# Altium PCB PCB1.PcbDoc
Units mil, origin at the board's own origin, x right, y up, seen from the top; angles counter-clockwise.
Board outline 6000 x 4000 mil, 2 copper layers (Top Layer, Bottom Layer); 4 components, 27 nets, 54 pads, 27 vias.
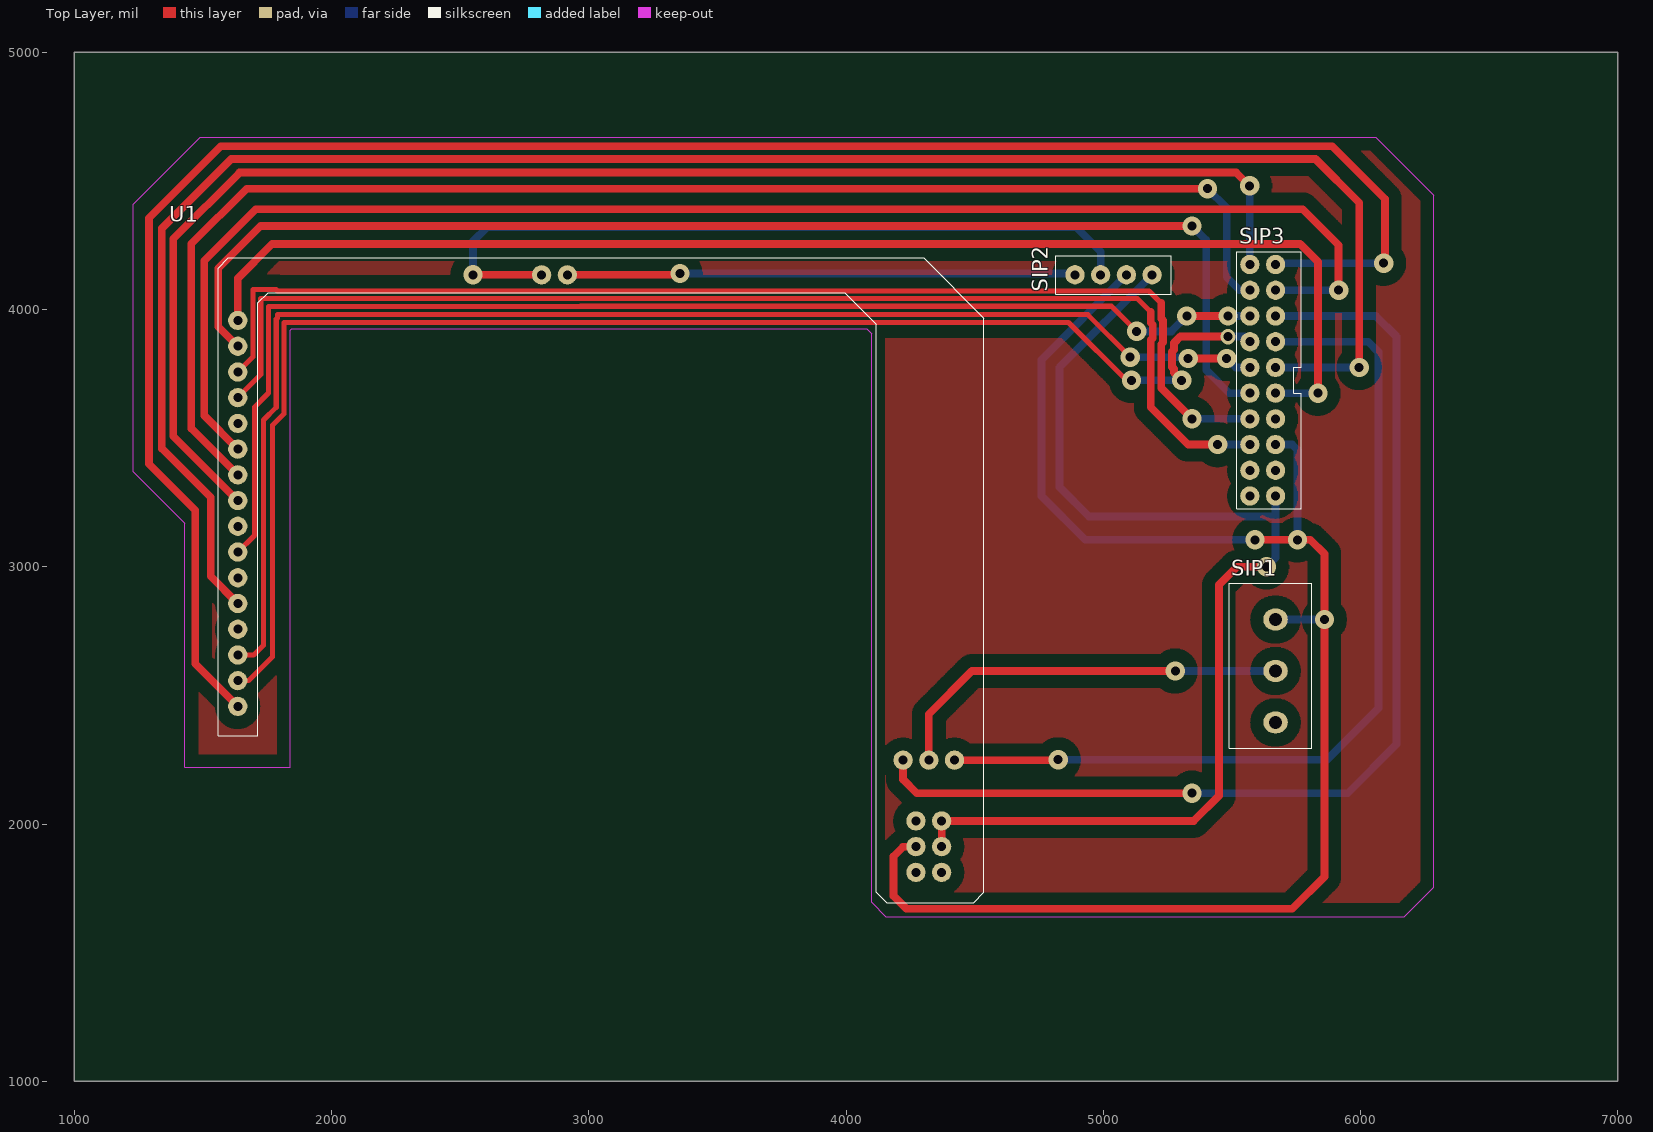
[diagram p0: Top Layer view]
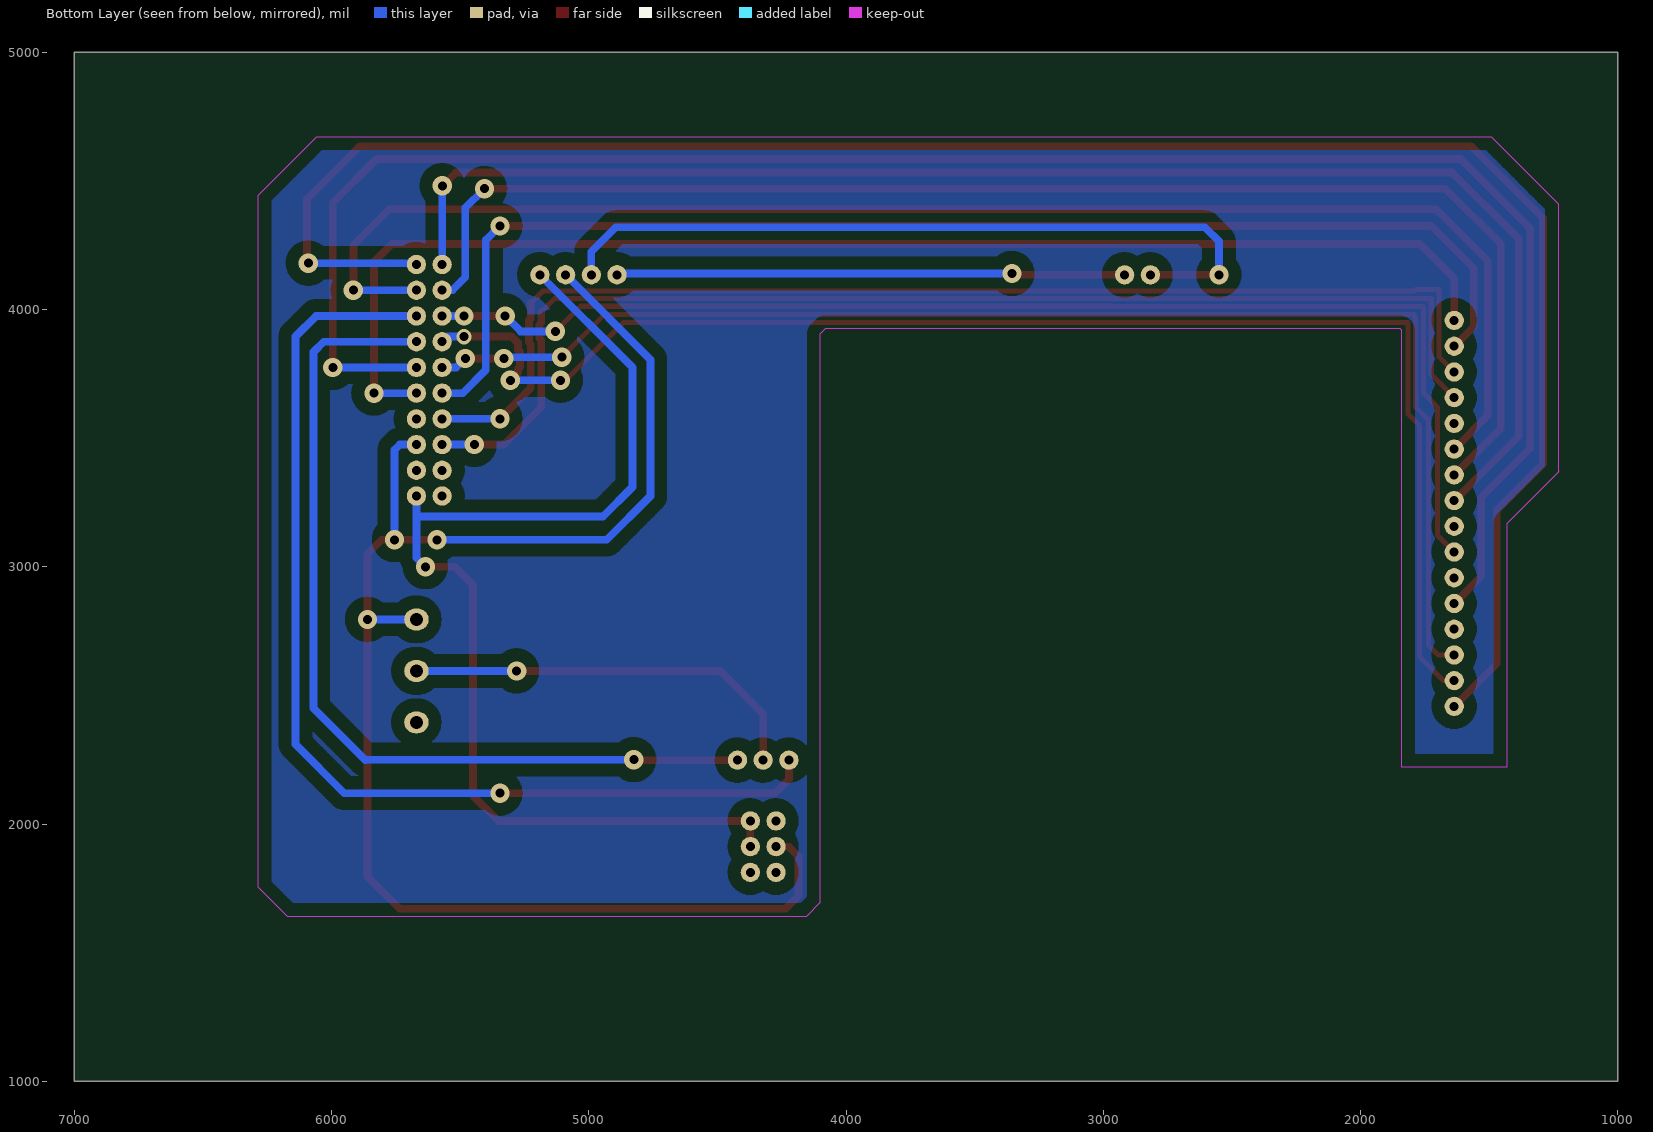
[diagram p1: Bottom Layer view, seen from below]

## Layer stack, top to bottom
Top Layer: signal copper 1.4
Dielectric: dielectric 12.6, FR-4, Dk 4.8
Bottom Layer: signal copper 1.4

## Board outline
1000,1000 7000,1000 7000,5000 1000,5000

## Design rules (kind name [scope] priority, off if disabled: settings)
Clearance [All] p1: gap=50
PolygonConnect [All] p1: connectstyle=Relief reliefconductorwidth=10 reliefentries=4 polygonreliefangle="90 Angle"
RoutingVias [All] p1: holewidth=35 width=75 viastyle="Through Hole" minholewidth=28 minwidth=50 maxholewidth=35 maxwidth=75
SilkscreenOverComponentPads [All] p1: minsilkscreentomaskgap=10
SolderMaskExpansion [All] p1: expansion=4
Width [All] p1: maxlimit=100 minlimit=10 preferedwidth=50
27 further rules are at their usual default settings.

## Components (designator, comment, footprint, x,y, rotation, side; value= is the part's Value field where it differs from the comment)
SIP1 "SIP3" SIP3 5670,2395 r90 top
SIP2 "SIP4" SIP4 5190,4135 r180 top
SIP3 "SIP20" SIP20 5570,3275 r90 top
U1 "ALIENTEK ZJB" "ALIENTEK ZJB" 1360,375 r0 top

## Footprints (in the part's own frame and the unit in brackets; to place one, negate y for a bottom-side part, rotate by r counter-clockwise, add the part's x,y. Pads: shape width x height; smd on the part's side, far side on the other; paste and mask are expansions set on the pad)
"ALIENTEK ZJB" [mm]
  round 1.905 hole 0.889: 1(7,91) 2(7,88.45) 3(7,85.91) 4(7,83.375) 5(7,80.83) 6(7,78.29) 7(7,75.75) 8(7,73.21) 9(7,70.67) 10(7,68.13) 11(7,65.59) 12(7,63.05) 13(7,60.51) 14(7,57.97) 15(7,55.43) 16(7,52.89) 17(37,95.5) 18(39.54,95.5) 19(76.5,36.5) 20(73.96,36.5) 21(76.5,39.04) 22(73.96,39.04) 23(76.5,41.58) 24(73.96,41.58) 25(77.775,47.58) 26(75.235,47.58) 27(72.695,47.58)
  silkscreen extent 5.05,33.5 80.67,97.17
SIP3 [mil]
  oval 85x95 hole 50: 1(0,0) 2(200,0) 3(400,0)
  silkscreen extent -100,-140 540,180
SIP4 [mil]
  round 75 hole 35: 1(0,0) 2(100,0) 3(200,0) 4(300,0)
  silkscreen extent -75,-75 375,75
SIP20 [mil]
  round 75 hole 35: 1(0,-100) 2(100,-100) 3(200,-100) 4(300,-100) 5(400,-100) 6(500,-100) 7(600,-100) 8(700,-100) 9(800,-100) 10(900,-100) 11(0,0) 12(100,0) 13(200,0) 14(300,0) 15(400,0) 16(500,0) 17(600,0) 18(700,0) 19(800,0) 20(900,0)
  silkscreen extent -50,-200 950,50

## Via types
v1: diameter 75, hole 35, Top Layer to Bottom Layer, 26 vias
v2: diameter 60, hole 35, Top Layer to Bottom Layer, 1 vias

## Nets (pads, with @x,y where several pads share a name; then routed paths per layer and width w, separated by ;. In a path a pad name is that pad's centre, name@x,y a point inside that pad or via, vN(x,y) a via of type N, cw(c..) or ccw(c..) an arc to the next point about the centre after c; other vN are vias at no path point)
1: SIP3.5 U1.1 | length 5122
  Top Layer w30: U1.1 1635.59,4120.59 1770,4255 5765,4255 5835,4185 v1(5835,3675)
  Bottom Layer w30: SIP3.5 v1(5835,3675)
2: SIP3.15 U1.2 | length 4977.4
  Top Layer w30: U1.2 1560,3932.87 1560,4160 1725,4325 v1(5345,4325)
  Bottom Layer w30: v1(5345,4325) 5400,4270 5400,3765 5490,3675 SIP3.15
3: SIP3.14 U1.3 | length 4627.2
  Top Layer w20: U1.3 1695,3816.69 1695,4077.34 1784.5,4077.34 1789.5,4072.34 2942.58,4072.34 ; 2942.74,4072.5 5177.5,4072.5 5225,4025
  Top Layer w30: 5225,4025 5225,3964.96 5232.5,3957.46 5232.5,3872.54 5225,3865.04 5225,3695 v1(5345,3575)
  Bottom Layer w30: v1(5345,3575) SIP3.14
4: SIP3.13 U1.4 | length 4725
  Top Layer w20: U1.4 1725,3746.89 1725,4042.34 2955.01,4042.34 2955.17,4042.5 5132.5,4042.5 5185,3990
  Top Layer w30: 5185,3990 5185,3948.39 5192.5,3940.89 5192.5,3889.11 5185,3881.61 5185,3620 5330,3475 v1(5445,3475)
  Bottom Layer w30: v1(5445,3475) SIP3.13
5: U1.5
5V: SIP2.1 SIP3.1 U1.21 U1.23 | length 4404
  Top Layer w30: U1.21 U1.23 5352.01,2012.01 5450,2110 5450,2930 5520,3000 v1(5635,3000)
  Bottom Layer w30: SIP2.1 4830,3775 4830,3310 4945,3195 5670,3195 ; v1(5635,3000) 5670,3035 5670,3195 ; SIP3.1 5670,3195
6: SIP3.9 U1.6 | length 5757.6
  Top Layer w30: U1.6 1505,3587.87 1505,4190 1705,4390 5775,4390 5915,4250 v1(5915,4075)
  Bottom Layer w30: SIP3.9 v1(5915,4075)
7: SIP3.19 U1.7 | length 5498.4
  Top Layer w30: U1.7 1455,3537.87 1455,4255 1670,4470 v1(5405,4470)
  Bottom Layer w30: v1(5405,4470) 5480,4395 5480,4125 5530,4075 SIP3.19
8: SIP3.20 U1.8 | length 5738.9
  Top Layer w30: U1.8 1385,3507.87 1385,4275 1642.5,4532.5 5517.5,4532.5 v1(5569.25,4480.75)
  Bottom Layer w30: SIP3.20@5569.25,4175.75 v1(5569.25,4480.75)
9: U1.9
10: SIP3.18 U1.10 | length 4884.8
  Top Layer w20: U1.10 1700,3121.69 1700,3620 1755,3675 1755,4012.34 2967.43,4012.34 2967.59,4012.5 5032.5,4012.5 v1(5130,3915)
  Top Layer w30: v1(5325,3975) v1(5485,3975)
  Bottom Layer w30: v1(5130,3915) 5265,3915 v1(5325,3975) ; v1(5485,3975) SIP3.18
11: U1.11
12: SIP3.6 U1.12 | length 7382.4
  Top Layer w30: U1.12 1530,2962.87 1530,3270 1340,3460 1340,4315 1610,4585 5825,4585 5995,4415 v1(5995,3775)
  Bottom Layer w30: SIP3.6 v1(5995,3775)
12V: SIP1.1
13: U1.13
14: SIP3.16 U1.14 | length 5287.7
  Top Layer w20: U1.14 1697.28,2657.28 1735,2695 1735,3570 1785,3620 1785,3962.43 1790,3967.43 1790,3980 4940,3980 v1(5105,3815)
  Top Layer w30: v1(5330,3810) v1(5480,3810)
  Bottom Layer w30: v1(5105,3815) 5325,3815 v1(5330,3810) ; v1(5480,3810) 5515,3775 SIP3.16
15: SIP3.17 U1.15 | length 5551.9
  Top Layer w20: U1.15 1677.28,2557.28 1770,2650 1770,3550 1815,3595 1815,3950 4865,3950 v1@5090,3725
  Top Layer w30: v1@5090,3725 v1(5110,3725) ; v1(5305,3725) 5275,3755 5275,3769.11 5267.5,3776.61 5267.5,3835.89 5275,3843.39 5275,3870 5300,3895 v2(5485,3895)
  Bottom Layer w30: v1(5110,3725) v1(5305,3725) ; v2(5485,3895) 5550,3895 SIP3.17
16: SIP3.10 U1.16 | length 7723.8
  Top Layer w30: U1.16 1470,2622.87 1470,3220 1290,3400 1290,4355 1570,4635 5890,4635 6095,4430 6095,4175 v1(6090,4180)
  Bottom Layer w30: SIP3.10@5675,4180 v1(6090,4180)
17: SIP2.3 U1.17 | length 2988.7
  Top Layer w30: v1(2550,4135) U1.17@2816.54,4135
  Bottom Layer w30: v1(2550,4135) 2550,4265 2605,4320 4895,4320 4990,4225 SIP2.3
18: SIP2.4 U1.18 | length 1973.4
  Top Layer w30: U1.18 3354.84,4134.84 3355,4135 v1(3355,4140)
  Bottom Layer w30: v1(3355,4140) SIP2.4@4885,4140
19: U1.19
20: U1.20
24: U1.24
25: SIP3.7 U1.25 | length 3539.2
  Top Layer w30: U1.25 4826.77,2248.23 v1(4825,2250)
  Bottom Layer w30: v1(4825,2250) 5870,2250 ; SIP3.7 6030,3875 6070,3835 6070,2450 5870,2250 ; 5868.23,2248.23 5870,2250
26: SIP1.2 U1.26 | length 1596.4
  Top Layer w30: U1.26 4322.01,2427.01 4490,2595 v1(5280,2595)
  Bottom Layer w30: v1(5280,2595) SIP1.2
27: SIP3.8 U1.27 | length 4182
  Top Layer w30: U1.27 4222.01,2172.99 4275,2120 v1(5345,2120)
  Bottom Layer w30: v1(5345,2120) 5950,2120 6140,2310 6140,3895 6060,3975 SIP3.8
GND: SIP1.3 SIP2.2 SIP3.3 U1.22 | length 6082.8
  Top Layer w30: U1.22 4222.01,1912.01 4185,1875 4185,1720 4235,1670 5735,1670 5860,1795 v1(5860,2795) 5860,3050 5805,3105 v1(5755,3105) v1(5590,3105)
  Bottom Layer w30: SIP2.2 4760,3805 4760,3275 4930,3105 v1(5590,3105) ; SIP1.3 v1(5860,2795) ; SIP3.3 5735,3475 5755,3455 v1(5755,3105)
pads on no net: SIP3.2 SIP3.4 SIP3.11 SIP3.12

## Polygon pours and split planes (outlines as drawn)
no net on Top Layer "Mechanical 1-No Net" (hatched 90Degree grid 3 track 4): 1840,2220 1840,3920 1845,3925 4080,3925 4100,3905 4100,1695 4155,1640 6170,1640 6285,1755 6285,4445 6060,4670 1490,4670 1230,4410 1230,3370 1430,3170 1430,2220 1840,2220
no net on Bottom Layer "Mechanical 1-No Net" (hatched 90Degree grid 3 track 4): 1430,2220 1840,2220 1840,3920 1845,3925 4080,3925 4100,3905 4100,1695 4155,1640 6170,1640 6285,1755 6285,4445 6060,4670 1490,4670 1230,4410 1230,3370 1430,3170 1430,2220

## Keep-outs
Keep-Out Layer:
  lines w2: 1230,3370 1430,3170 1430,2220 1840,2220 1840,3920 1845,3925 4080,3925 4100,3905 4100,1695 4155,1640 4310,1640 6170,1640 6285,1755 6285,4445 6060,4670 1490,4670 1230,4410 1230,3370